# Altium PCB Power Supply.PcbDoc
Units mm, origin at the board's own origin, x right, y up, seen from the top; angles counter-clockwise.
Board outline 53.34 x 43.18 mm, 2 copper layers (Top Layer, Bottom Layer); 16 components, 6 nets, 35 pads, 0 vias.
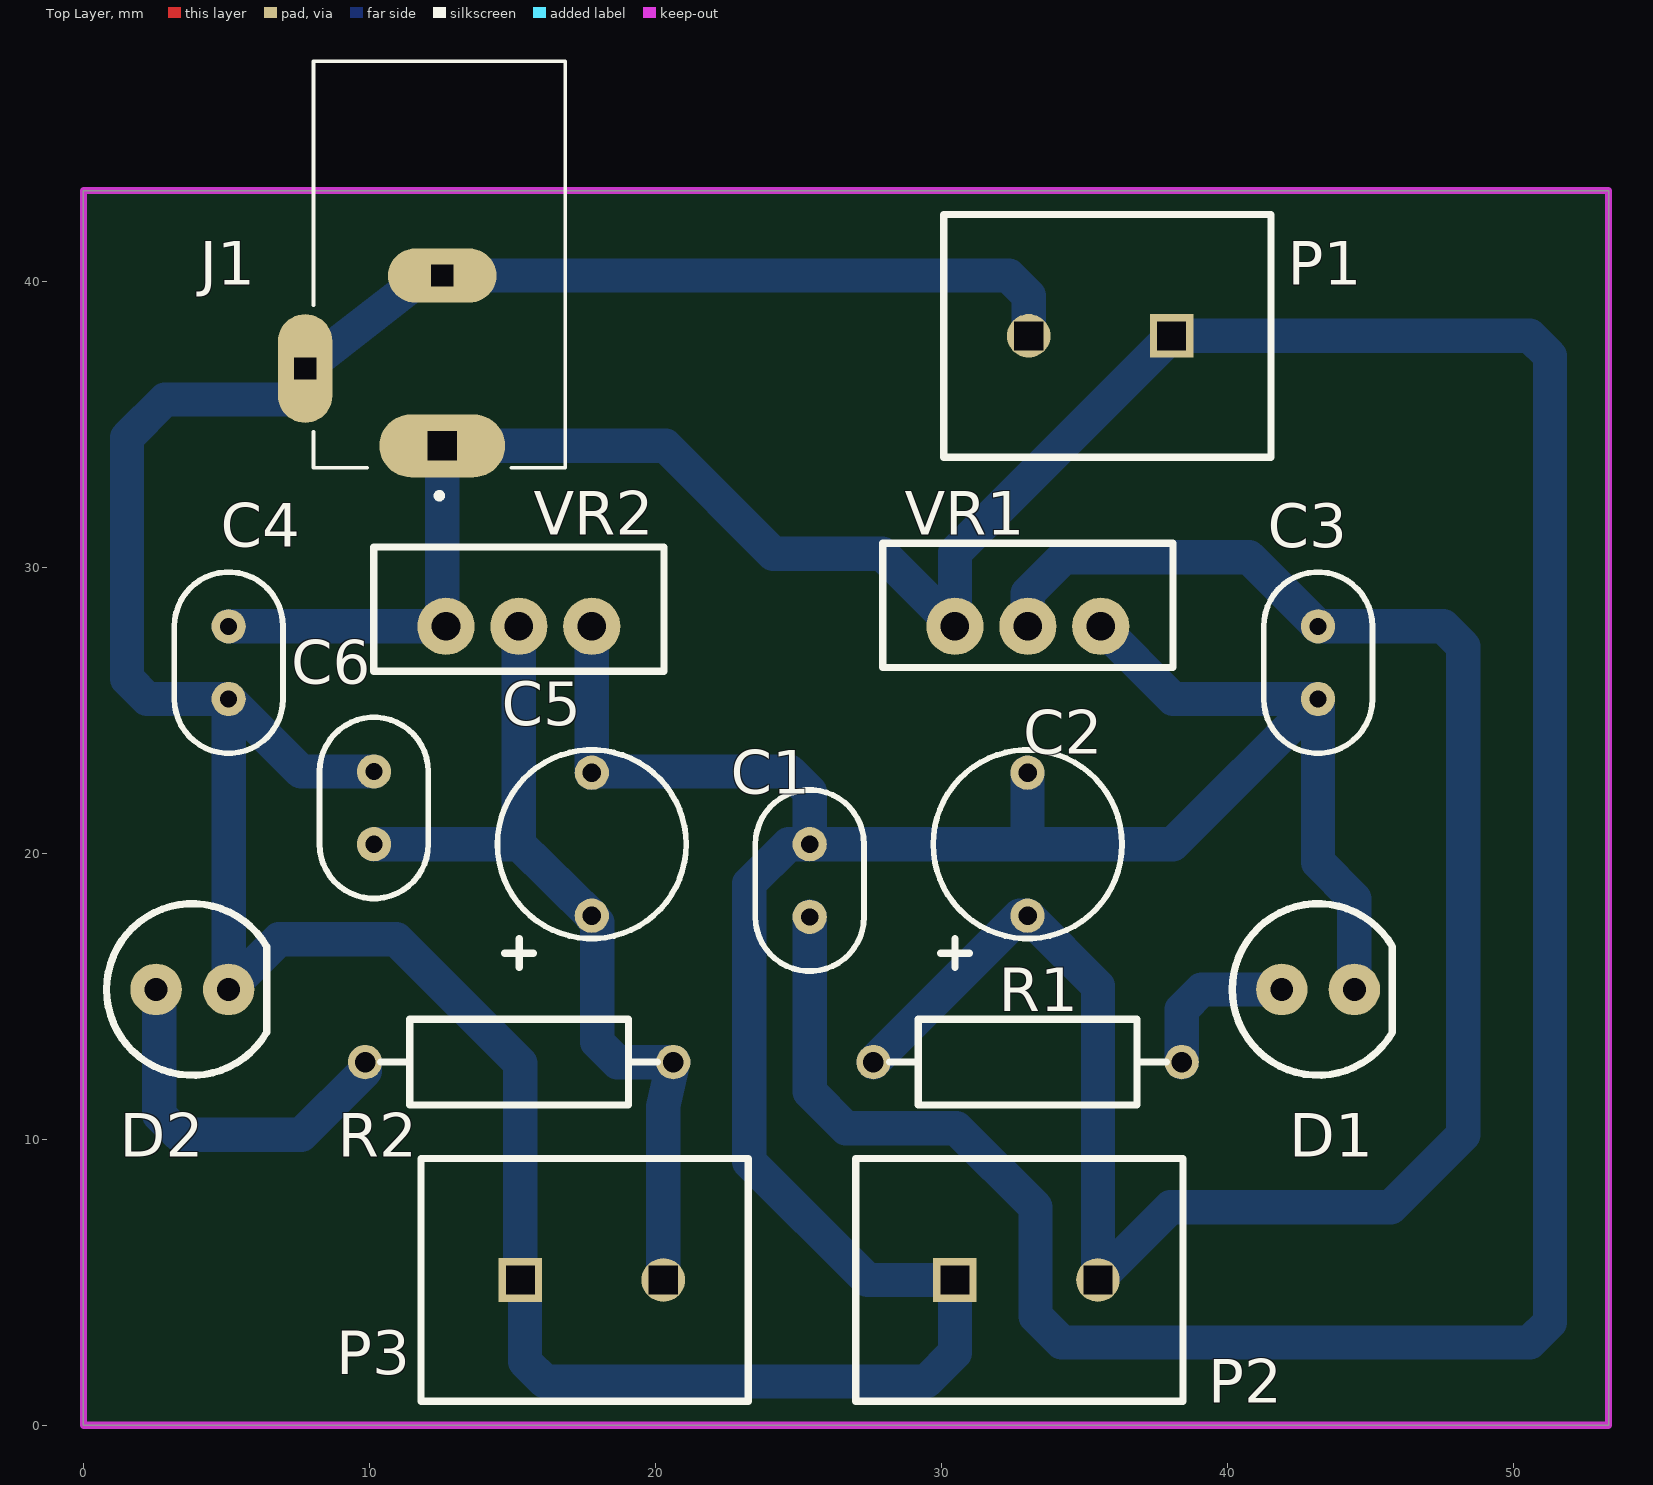
[diagram p0: Top Layer view]
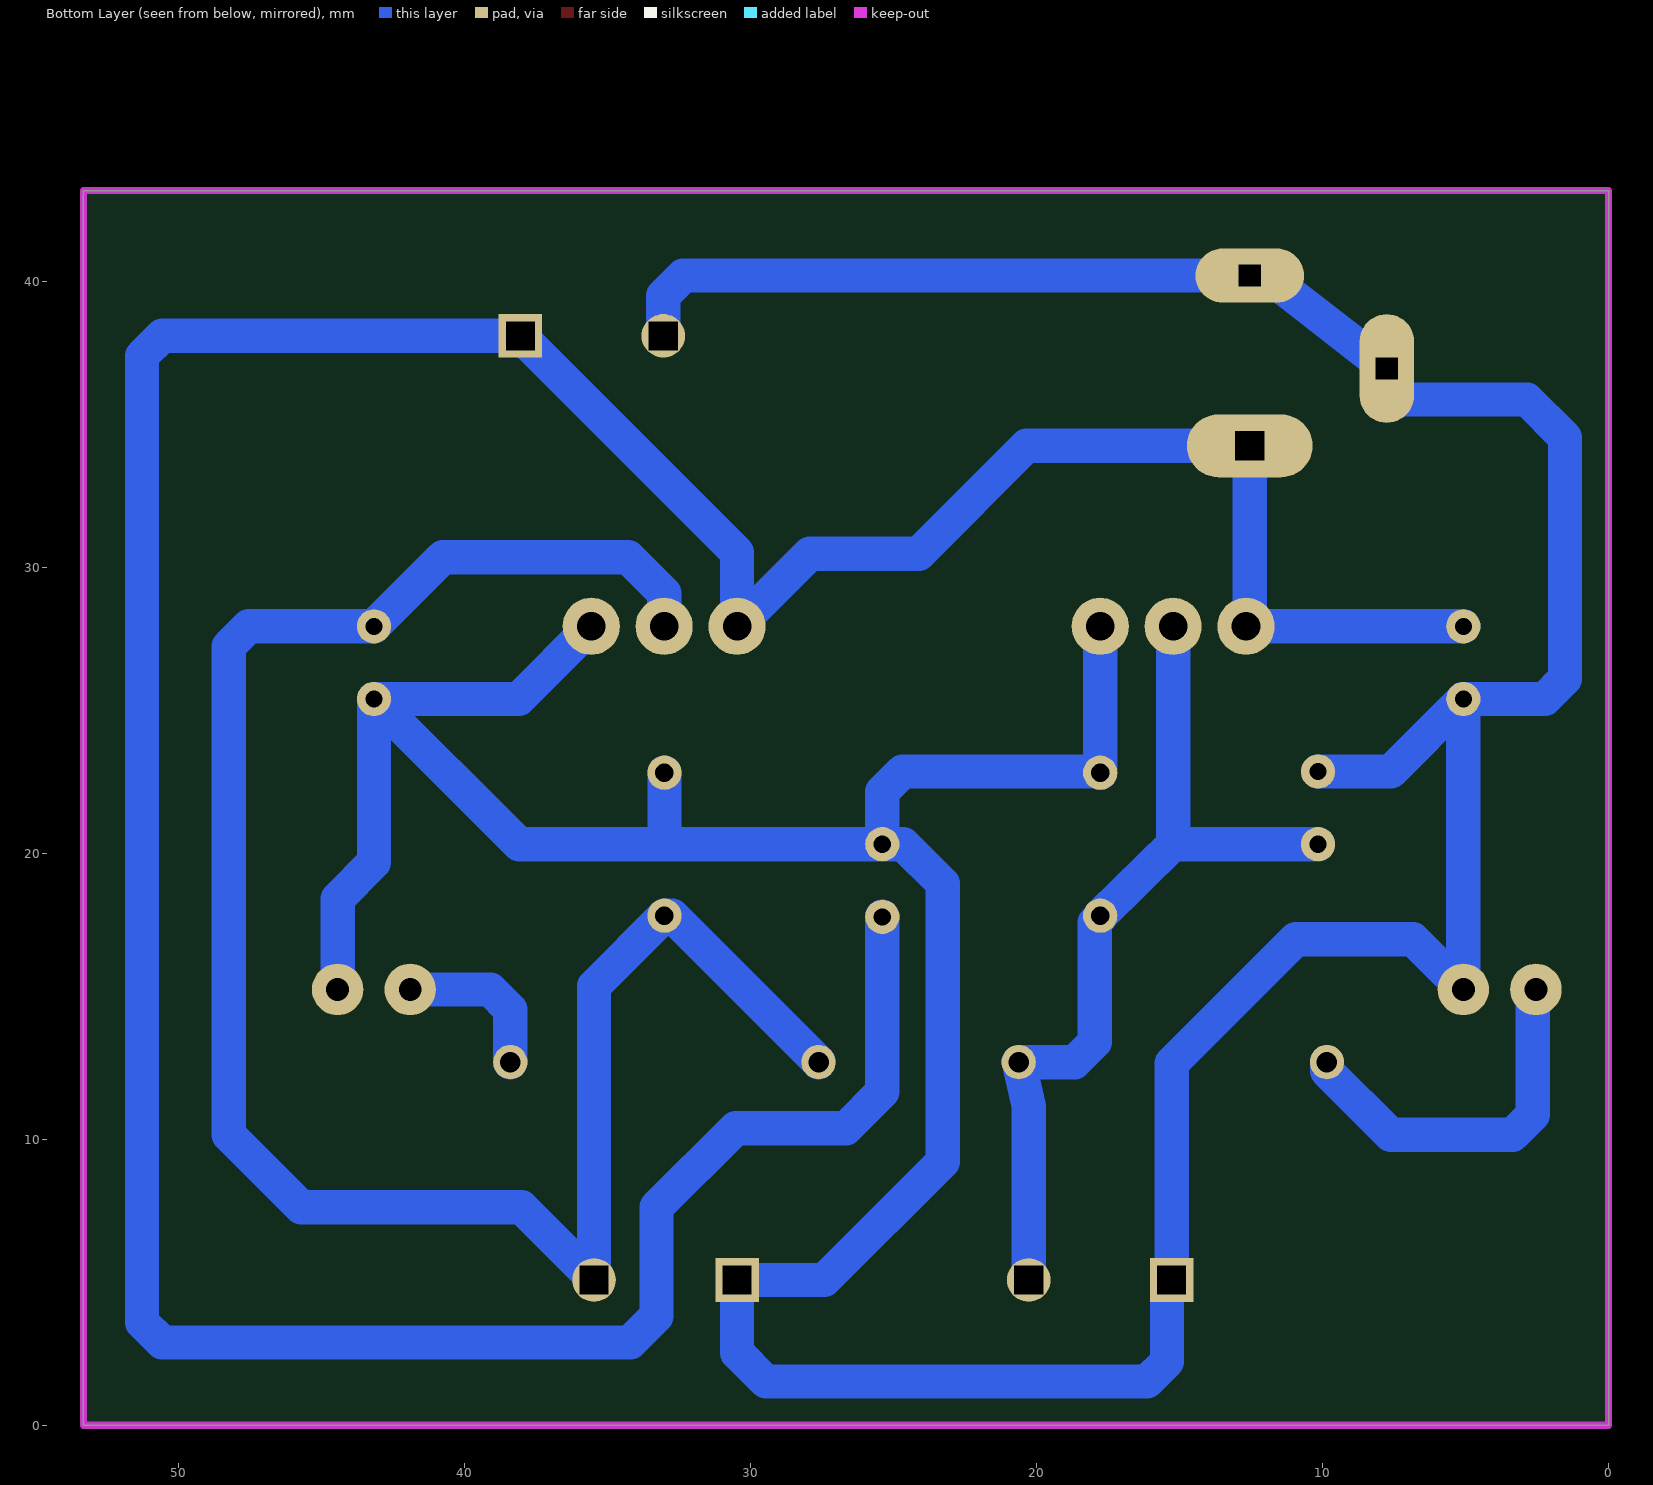
[diagram p1: Bottom Layer view, seen from below]
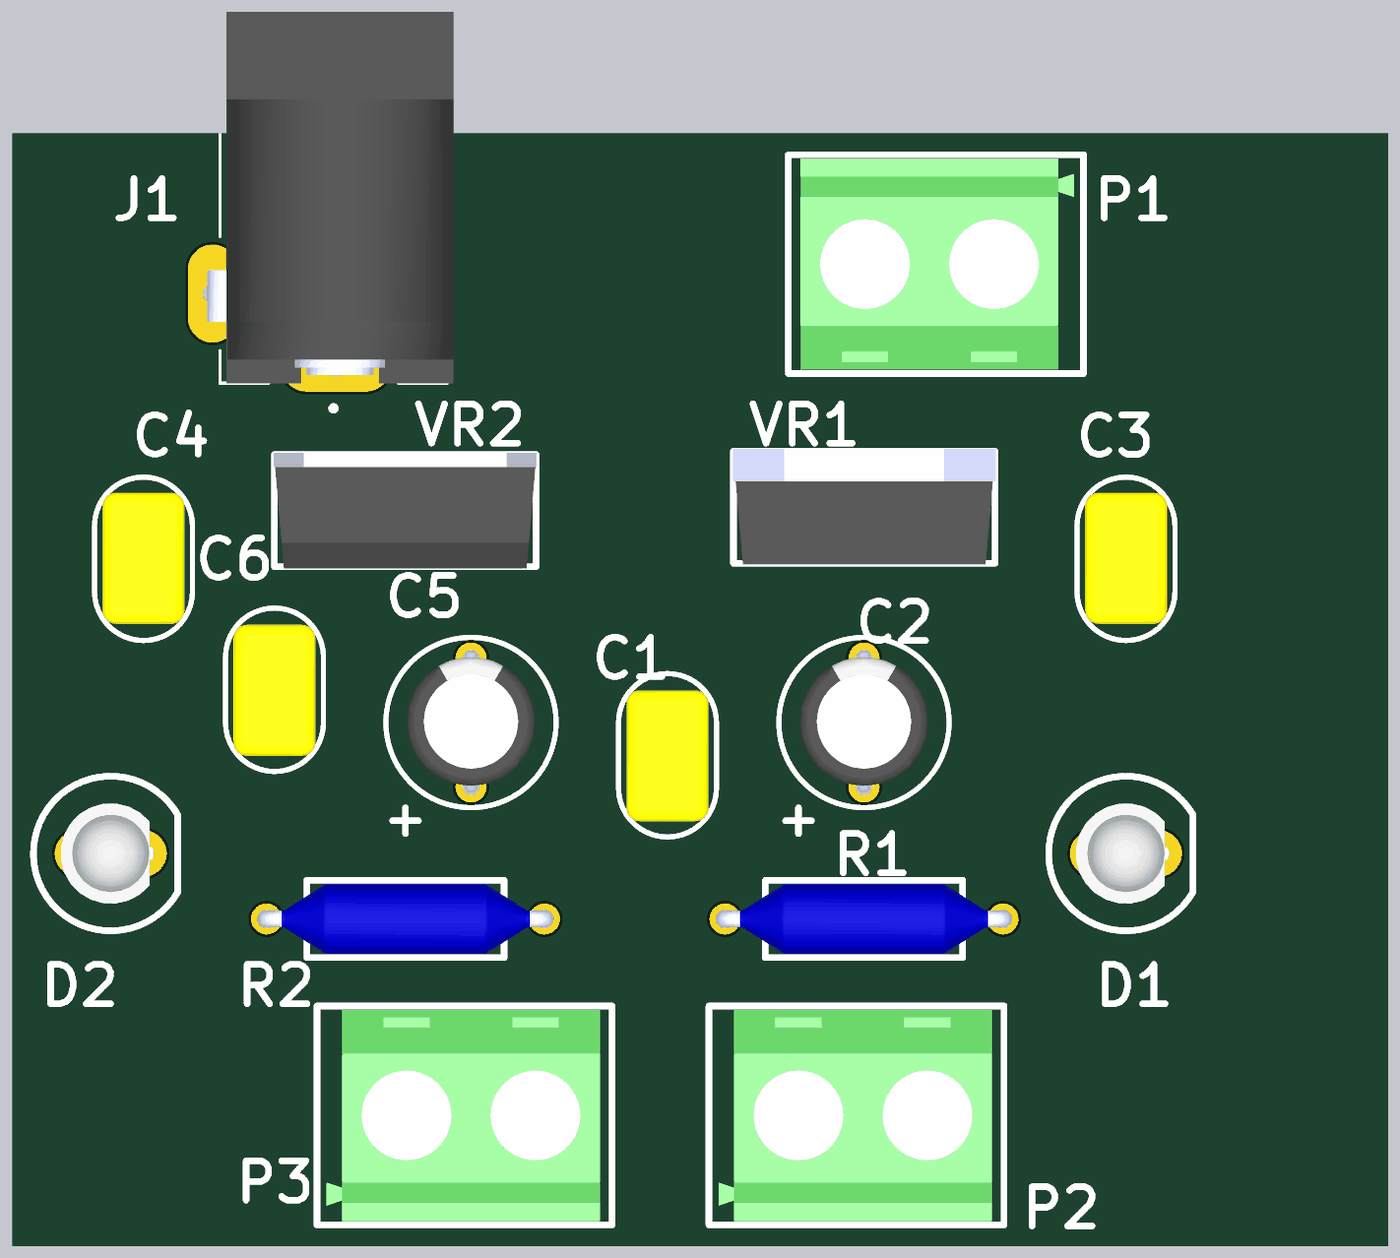
[diagram p2: 3D render of the assembled board from above, using the file's embedded part models]

## Layer stack, top to bottom
Top Solder: solder mask 0.0102, Solder Resist, Dk 3.5
Top Layer: signal copper 0.0356
Dielectric 1: dielectric 0.32, FR-4, Dk 4.8
Bottom Layer: signal copper 0.0356
Bottom Solder: solder mask 0.0102, Solder Resist, Dk 3.5

## Board outline
0,0 0,43.18 53.34,43.18 53.34,0

## Design rules (kind name [scope] priority, off if disabled: settings)
Clearance Clearance_4 [InNamedPolygon('NONET_L01_P000')] p1: gap=0.254 ignorepadtopadclearanceinfootprint=FALSE except(0: Arc-Hole Track-Hole SMDPad-Hole THPad-Hole Via-Hole Fill-Hole Poly-Hole Region-Hole Text-Hole)
Clearance Clearance_3 [InNamedPolygon('NONET_L01_P000')] p2: gap=0.8 ignorepadtopadclearanceinfootprint=FALSE
Clearance Clearance_2 [InNamedPolygon('GND_L02_P000')] p3: gap=0.8 ignorepadtopadclearanceinfootprint=FALSE
Clearance Clearance_1 [InNamedPolygon('GND_L02_P000')] p4: gap=0.8 ignorepadtopadclearanceinfootprint=FALSE
Clearance [All] p5: gap=0.4 ignorepadtopadclearanceinfootprint=FALSE
PolygonConnect [All] p1: connectstyle=Relief reliefconductorwidth=0.254 reliefentries=4 polygonreliefangle="90 Angle" airgapwidth=0.254
RoutingLayers [All] p1: top layer_v5=FALSE bottom layer_v5=TRUE
RoutingVias [All] p1: holewidth=0.711 width=1.27 viastyle="Through Hole" minholewidth=0.711 minwidth=1.27 maxholewidth=0.711 maxwidth=1.27
SolderMaskExpansion [All] p1: expansion=0.102 istentingtop=FALSE
Width [All] p1: maxlimit=1.2 minlimit=1.2 preferedwidth=1.2 minimp=50.000000 maximp=50.000000 favimp=50.000000
29 further rules are at their usual default settings.

## Components (designator, comment, footprint, x,y, rotation, side; value= is the part's Value field where it differs from the comment)
C1 "0.1uF" CAPACITOR 25.4,17.78 r90 top
C2 "10 uF" "POL CAP" 33.02,20.32 r90 top
C3 "0.1uF" CAPACITOR 43.18,27.94 r270 top
C4 "0.1uF" CAPACITOR 5.08,27.94 r270 top
C5 "10 uF" "POL CAP" 17.78,20.32 r90 top
C6 "0.1uF" CAPACITOR 10.16,20.32 r90 top
D1 "LED" LED 43.18,15.24 r0 top
D2 "LED" LED 3.81,15.24 r0 top
J1 "POWER JACK SOCKET" "POWER JACK SOCKET" 12.7,40.64 r180 top
P1 "TERMINAL BLOCK" "TERMINAL BLOCK" 35.56,38.1 r180 top
P2 "TERMINAL BLOCK" "TERMINAL BLOCK" 32.98,5.08 r0 top
P3 "TERMINAL BLOCK" "TERMINAL BLOCK" 17.78,5.08 r0 top
R1 "82" RESISTOR 33.02,12.7 r180 top
R2 "470" RESISTOR 15.24,12.7 r0 top
VR1 "7805" REGULATOR7805 33.03,27.94 r0 top
VR2 "7812" REGULATOR7812 15.23,27.94 r0 top

## Footprints (in the part's own frame and the unit in brackets; to place one, negate y for a bottom-side part, rotate by r counter-clockwise, add the part's x,y. Pads: shape width x height; smd on the part's side, far side on the other; paste and mask are expansions set on the pad)
CAPACITOR [mm] "capacitor"
  round 1.2 hole 0.6: 1(0,0) 2(2.54,0)
  silkscreen extent -1.9,-1.9 4.44,1.9, body extent -1.29,-1.59 3.79,1.59, height 6.08
LED [mm] "led"
  round 1.8 hole 0.8: 1(-1.27,0) 2(1.27,0)
  silkscreen extent -3,-3 2.6,3, body extent -1.95,-1.95 1.87,1.95, height 3.8
"POL CAP" [mm] "polarized capacitor"
  round 1.2 hole 0.65: 1(-2.5,0) 2(2.5,0)
  silkscreen extent -4.31,-3.3 3.3,3.3, body extent -2.71,-2.5 2.79,2.5, height 12.5
"POWER JACK SOCKET" [mm] "power  jack socket"
  oval 4.4x2.2 hole 1.02 square: 1(0.15,6.388)
  oval 3.8x1.9 hole 0.76 square: 2(0.15,0.433)
  oval 1.9x3.8 hole 0.76 square: 3(4.944,3.683)
  silkscreen extent -4.15,-7.06 4.65,8.23, body extent -4.4,-7.25 5.15,7.17, height 11.15
REGULATOR7805 [mm] "regulator 5v"
  round 2 hole 1: 1(-2.55,0) 2(0,0) 3(2.55,0)
  silkscreen extent -5.07,-1.44 5.07,2.9, body extent -5.1,-1.49 5.1,3.01, height 19.21
REGULATOR7812 [mm] "regulator 12v"
  round 2 hole 1: 1(-2.55,0) 2(0,0) 3(2.55,0)
  silkscreen extent -5.07,-1.57 5.07,2.77, body extent -5.1,-1.65 5.1,2.85, height 19.68
RESISTOR [mm] "resistor"
  round 1.2 hole 0.72: 1(-5.39,0) 2(5.39,0)
  silkscreen extent -4.85,-1.5 4.83,1.5, body extent -5.72,-1.34 5.73,1.35, height 2.69
"TERMINAL BLOCK" [mil] "terminal block"
  rect 60x60 hole 39.37 square: 1(-98.43,0)
  round 60 hole 39.37 square: 2(98.42,0)
  silkscreen extent -235,-167 215,167, body extent -220,-161 197,161, height 394

## Part data
C1 C3 C4 C6: library part CAPACITOR, Manufacture=AVX, Manufacture Part Number=AR205F104K4R
C2 C5: library part "POL CAP", Manufacture=Panasonic, Manufacture Part Number=EEUEB1J100SB
D1 D2: Manufacture="Wurth Electronics", Manufacture Part Number=151033GS03000
J1: Manufacture="MPD (Memory Protection Devices)", Manufacture Part Number=EJ508A
R1 R2: library part RESISTOR
VR1: Manufacture=STMicroelectronics, Manufacture Part Number=7805CV
VR2: Manufacture=STMicroelectronics, Manufacture Part Number=L7812CV

## Nets (pads, with @x,y where several pads share a name; then routed paths per layer and width w, separated by ;. In a path a pad name is that pad's centre, name@x,y a point inside that pad or via, vN(x,y) a via of type N, cw(c..) or ccw(c..) an arc to the next point about the centre after c; other vN are vias at no path point)
GND: C1.2 C2.2 C3.2 C4.2 C5.2 C6.2 D1.2 D2.2 J1.2 J1.3 P1.2 P2.1 P3.1 VR1.3 VR2.3 | length 183.9
  Bottom Layer w1.2: C6.2 7.62,22.86 C4.2 ; VR2.3 C5.2 17.82,22.86 24.697,22.86 25.4,22.157 C1.2 ; C2.2 33.02,20.32 ; P1.2 33.06,39.504 32.357,40.207 11.949,40.207 7.948,37.106 7.756,37.106 7.756,36.196 7.433,35.873 2.853,35.873 1.527,34.547 1.527,26.103 2.23,25.4 C4.2 ; VR1.3 38.12,25.4 C3.2 ; D1.2 44.45,18.415 43.18,19.685 C3.2 ; C4.2 D2.2 6.84,17 10.94,17 15.28,12.66 P3.1 15.442,4.918 15.442,2.23 16.145,1.527 29.467,1.527 30.48,2.54 P2.1 27.429,5.08 23.289,9.22 23.289,18.945 24.663,20.32 C1.2 ; C1.2 33.02,20.32 ; 33.02,20.32 38.1,20.32 C3.2
NetC1_1: C1.1 C4.1 J1.1 P1.1 VR1.1 VR2.1 | length 133.3
  Bottom Layer w1.2: C4.1 VR2.1 12.55,28.07 J1.1 20.358,34.252 24.13,30.48 27.94,30.48 VR1.1 30.48,30.52 P1.1 50.587,38.1 51.29,37.397 51.29,3.599 50.587,2.896 34.214,2.896 33.299,3.81 33.299,7.62 30.531,10.389 26.67,10.389 25.4,11.659 C1.1
NetC2_1: C2.1 C3.1 P2.2 R1.2 VR1.2 | length 71.4
  Bottom Layer w1.2: R1.2 31.44,16.51 32.75,17.82 C2.1 35.48,15.36 P2.2 38.02,7.62 45.72,7.62 48.26,10.16 48.26,27.237 47.557,27.94 C3.1 40.767,30.353 34.29,30.353 33.03,29.093 VR1.2
NetC5_1: C5.1 C6.1 P3.2 R2.2 VR2.2 | length 31.4
  Bottom Layer w1.2: C6.1 15.23,20.32 ; VR2.2 15.23,20.32 ; P3.2 20.28,11.157 R2.2 18.678,12.7 17.975,13.403 17.975,17.585 17.78,17.78 C5.1 15.23,20.32
NetD1_1: D1.1 R1.1 | length 5.6
  Bottom Layer w1.2: R1.1 38.41,14.537 39.113,15.24 D1.1
NetD2_1: D2.1 R2.1 | length 13.1
  Bottom Layer w1.2: D2.1 2.655,15.125 2.655,10.863 3.358,10.16 7.62,10.16 9.85,12.39 R2.1

## Keep-outs
Keep-Out Layer:
  the board outline again, w0.254